# Altium PCB controller_sg3525.PcbDoc
Units mm, origin at the board's own origin, x right, y up, seen from the top; angles counter-clockwise.
Board outline 63.63 x 49.15 mm, 2 copper layers (Top Layer, Bottom Layer); 34 components, 28 nets, 100 pads, 0 vias.
Unrouted connection lines stored in the file: 4.
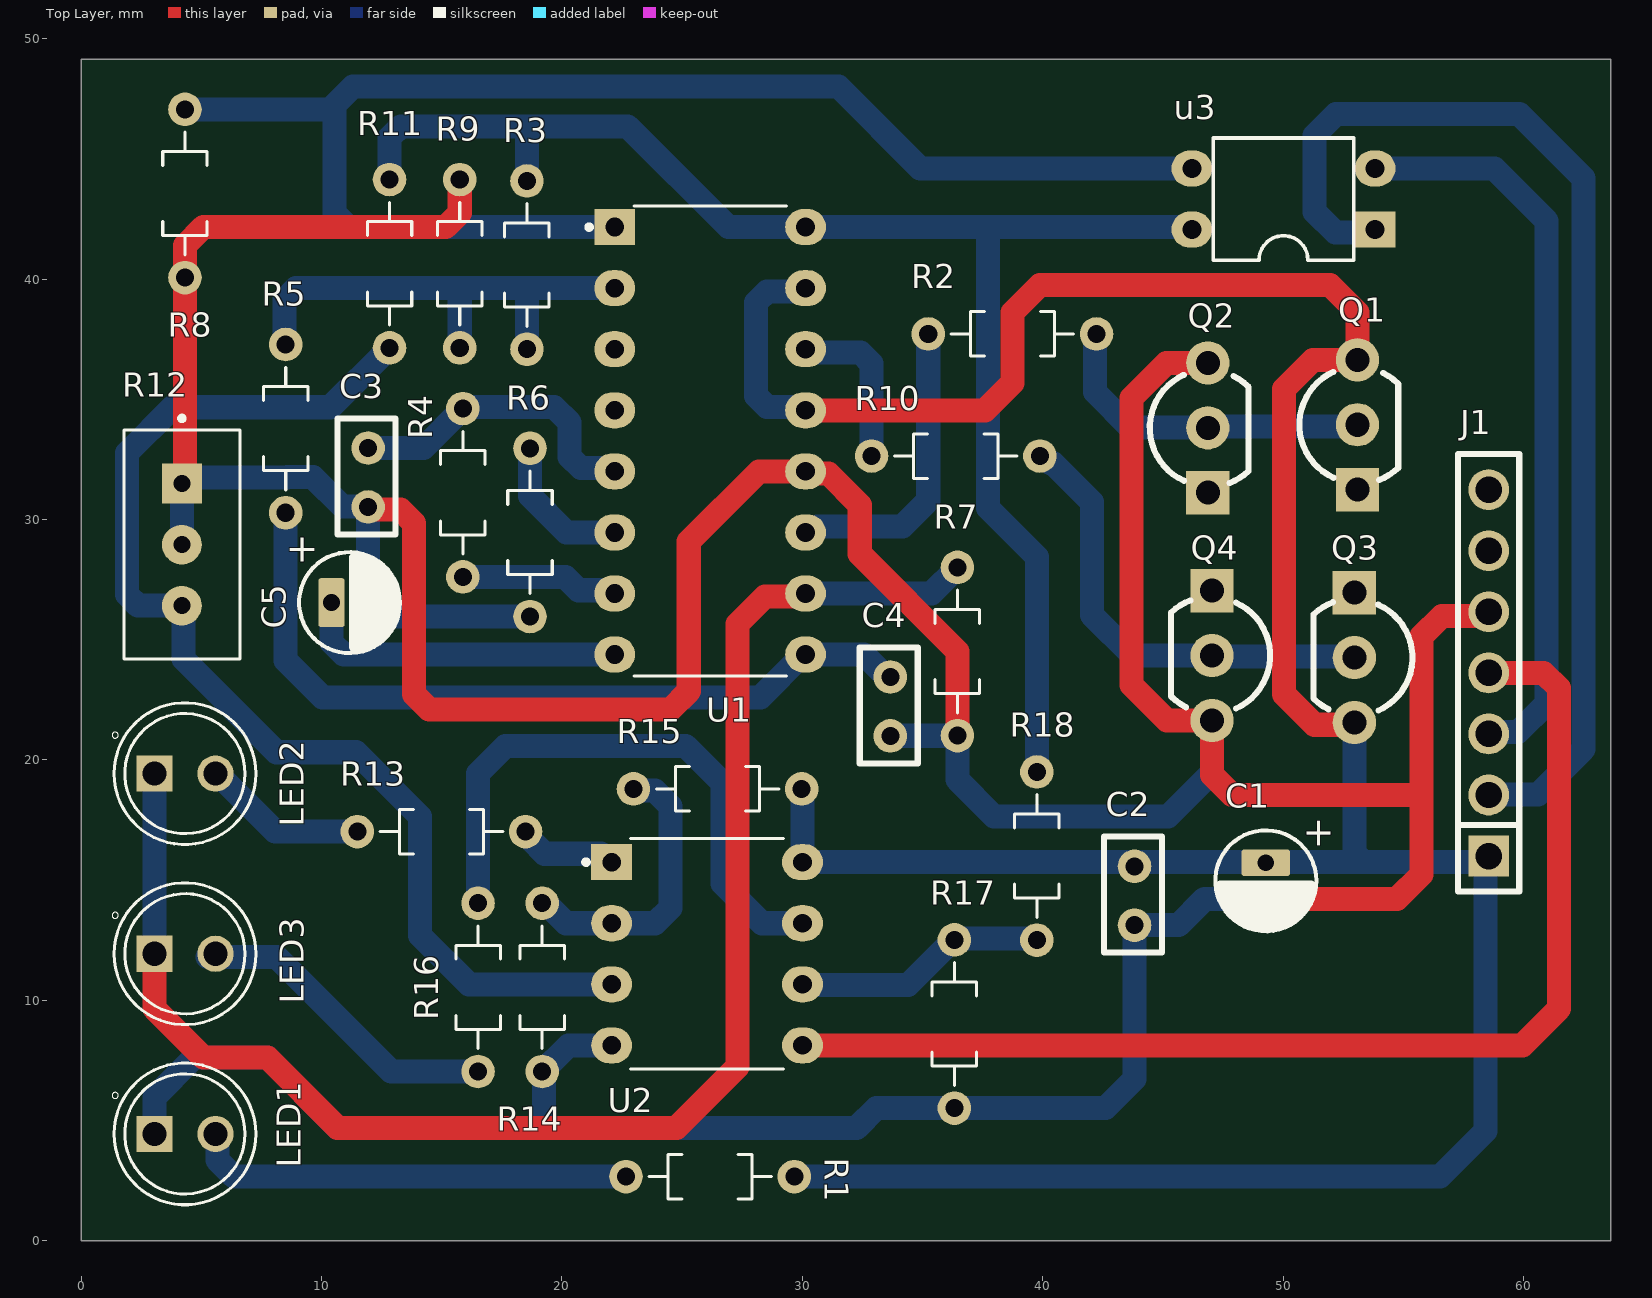
[diagram p0: Top Layer view]
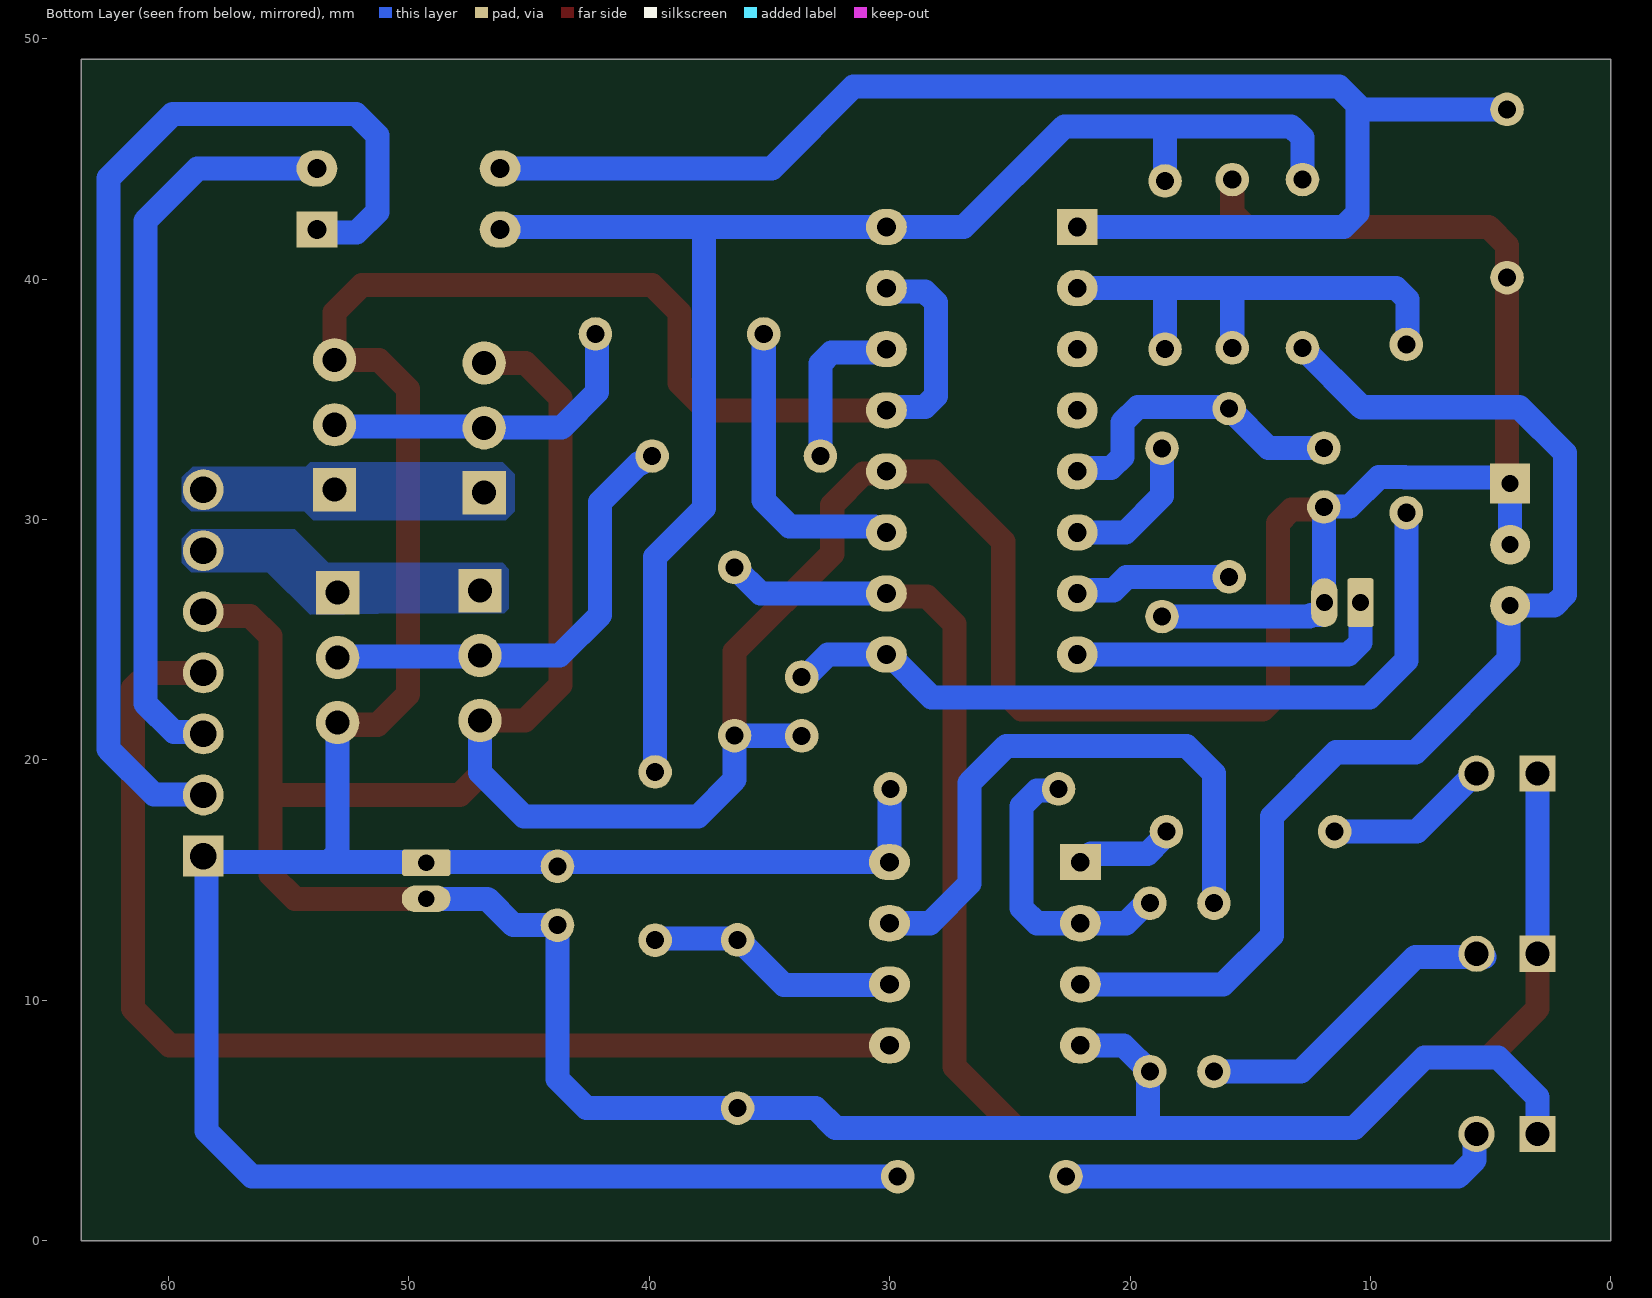
[diagram p1: Bottom Layer view, seen from below]
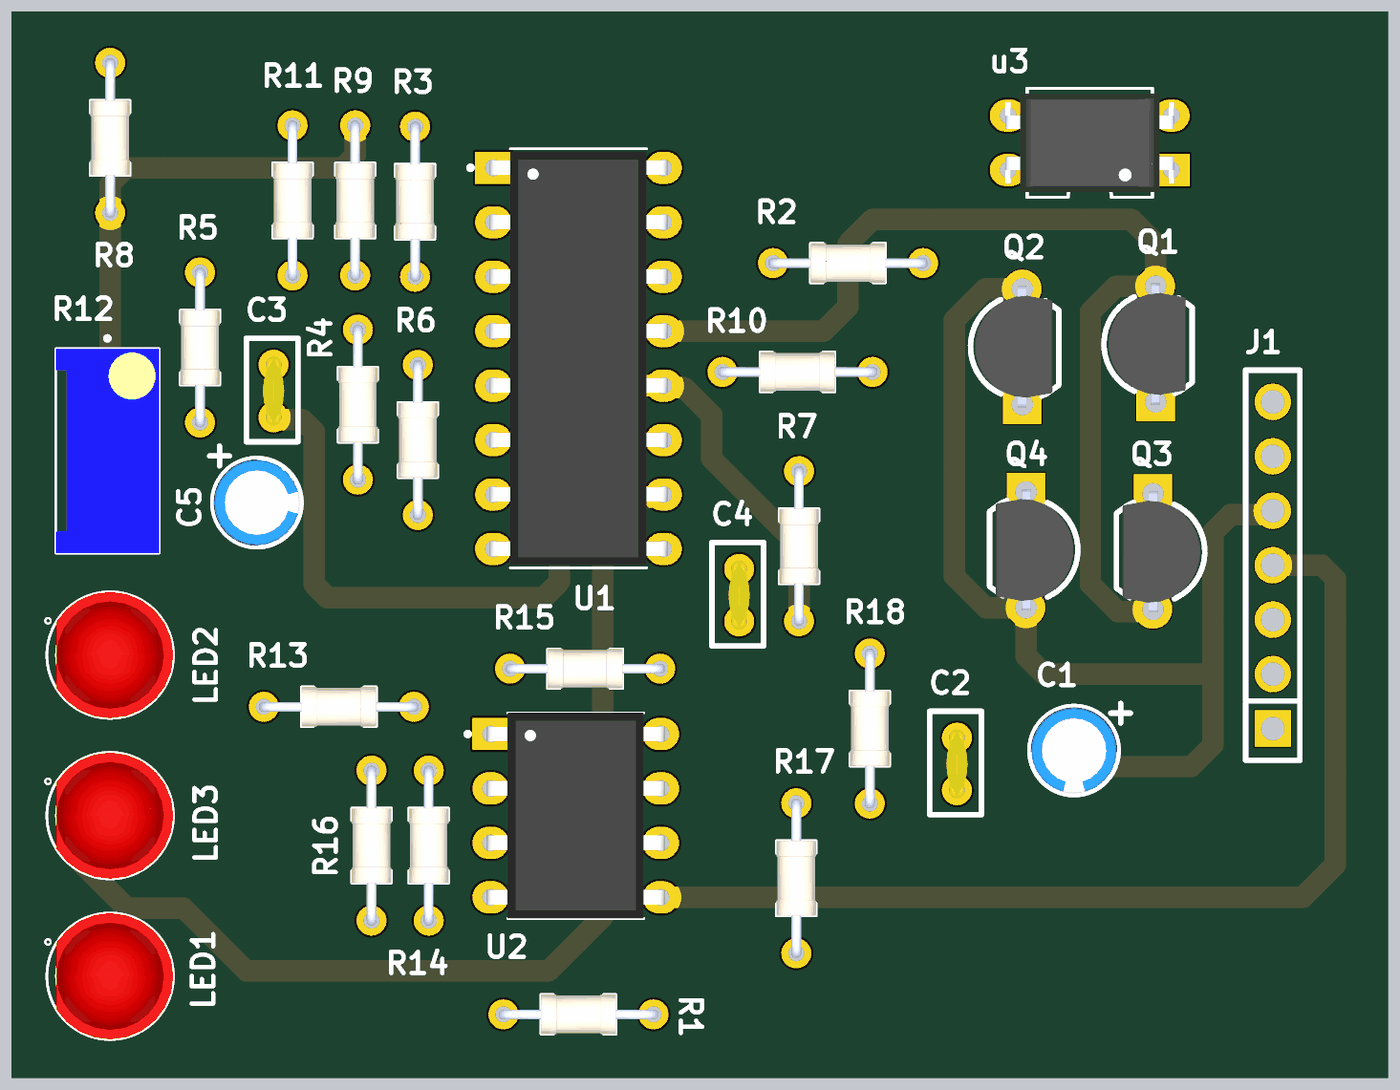
[diagram p2: 3D render of the assembled board from above, using the file's embedded part models]

## Layer stack, top to bottom
Top Solder: solder mask 0.0102, Solder Resist, Dk 3.5
Top Layer: signal copper 0.0356
Dielectric 1: dielectric 0.32, FR-4, Dk 4.8
Bottom Layer: signal copper 0.0356
Bottom Solder: solder mask 0.0102, Solder Resist, Dk 3.5

## Board outline
0,0 0,49.149 63.627,49.149 63.627,0

## Design rules (kind name [scope] priority, off if disabled: settings)
Clearance [All] p1: gap=0.254 ignorepadtopadclearanceinfootprint=FALSE except(0: Arc-Hole Track-Hole SMDPad-Hole THPad-Hole Via-Hole Fill-Hole Poly-Hole Region-Hole Text-Hole)
PlaneConnect [All] p1: planeconnectstyle=Direct reliefexpansion=0.508 reliefentries=4 reliefconductorwidth=0.254 reliefairgap=0.254
PolygonConnect [All] p1: connectstyle=Direct reliefconductorwidth=0.254 reliefentries=4 polygonreliefangle="90 Angle" airgapwidth=0.254
RoutingVias [All] p1: holewidth=0.711 width=1.27 viastyle="Through Hole" minholewidth=0.711 minwidth=1.27 maxholewidth=0.711 maxwidth=1.27
SolderMaskExpansion [All] p1: expansion=0.102 istentingtop=FALSE
Width [All] p1: maxlimit=1.5 minlimit=0.254 preferedwidth=0.8 minimp=50.000000 maximp=50.000000 favimp=50.000000
29 further rules are at their usual default settings.

## Components (designator, comment, footprint, x,y, rotation, side; value= is the part's Value field where it differs from the comment)
C1 "100UF25V" "CAP LS-1.5mm D4 H5" 49.276,15.724 r270 top
C2 "1UFCER" CAP-CER-2.54 43.815,14.351 r90 top
C3 "2.2NFCER" CAP-CER-2.54 11.938,31.75 r90 top
C4 "100nFCER" CAP-CER-2.54 33.655,22.225 r90 top
C5 "1UF25V" "CAP LS-1.5mm D4 H5" 10.414,26.543 r0 top
J1 "HDR7Pin" "HDR-TH 7P - male hader" 58.519,23.598 r90 top
LED1 "LED Red" "LED_5MM P2.5MM WHITE" 4.191,4.572 r0 top
LED2 "LED Red" "LED_5MM P2.5MM WHITE" 4.191,19.558 r0 top
LED3 "LED Red" "LED_5MM P2.5MM WHITE" 4.191,12.065 r0 top
Q1 "SS8050" TO-92 53.135,34.025 r90 top
Q2 "SS8550" TO-92 46.912,33.898 r90 top
Q3 "SS8050" TO-92 52.91,24.174 r270 top
Q4 "SS8550" TO-92 46.99,24.257 r270 top
R1 "1K" RES-TH-7mm 26.162,2.667 r0 top
R2 "1K" RES-TH-7mm 38.735,37.719 r0 top
R3 "10K" RES-TH-7mm 18.542,40.584 r90 top
R4 "10R" RES-TH-7mm 15.875,31.115 r270 top
R5 "10K" RES-TH-7mm 8.509,33.782 r90 top
R6 "5.5K" RES-TH-7mm 18.669,29.464 r90 top
R7 "100R" RES-TH-7mm 36.449,24.511 r90 top
R8 "100R" RES-TH-7mm 4.318,43.561 r90 top
R9 "10K" RES-TH-7mm 15.748,40.64 r270 top
R10 "1K" RES-TH-7mm 36.378,32.639 r180 top
R11 "20K" RES-TH-7mm 12.827,40.64 r90 top
R12 "10K" TRIM_3296W-1-250 4.191,28.956 r270 top
R13 "1K" RES-TH-7mm 14.986,17.018 r180 top
R14 "5K" RES-TH-7mm 19.177,10.541 r90 top
R15 "47K" RES-TH-7mm 26.472,18.796 r0 top
R16 "1K" RES-TH-7mm 16.51,10.541 r270 top
R17 "1K" RES-TH-7mm 36.322,9.017 r90 top
R18 "4K" RES-TH-7mm 39.751,16.002 r90 top
U1 "SG3525AN" DIP-16 26.162,33.274 r0 top
U2 "LM358" DIP-8 25.908,12.319 r0 top
u3 "PC817" DIP-4 49.784,43.18 r180 top

## Footprints (in the part's own frame and the unit in brackets; to place one, negate y for a bottom-side part, rotate by r counter-clockwise, add the part's x,y. Pads: shape width x height; smd on the part's side, far side on the other; paste and mask are expansions set on the pad)
"CAP LS-1.5mm D4 H5" [mm]
  rrect20% 1.1x2.032 hole 0.7: 1(0,0)
  oval 1.1x2.032 hole 0.7: 2(1.5,0)
  silkscreen extent -1.35,-2.1 2.85,2.1, body extent -1.25,-2 2.74,2, height 5
CAP-CER-2.54 [mm]
  round 1.397 hole 0.75: 1(-1.225,0) 2(1.225,0)
  silkscreen extent -2.37,-1.14 2.46,1.27, body extent -1.62,-0.5 1.62,0.5, height 4.99
DIP-4 [mm]
  rect 1.7x1.5 hole 0.78: 1(-4.037,1.12)
  oval 1.7x1.5 hole 0.78: 2(-4.037,-1.42) 3(3.583,-1.42) 4(3.583,1.12)
  silkscreen extent -3.15,-2.69 2.69,2.39, body extent -4.16,-2.45 3.71,2.15, height 4.55
DIP-8 [mm]
  rect 1.7x1.5 hole 0.78: 1(-3.843,3.429)
  oval 1.7x1.5 hole 0.78: 2(-3.843,0.889) 3(-3.843,-1.651) 4(-3.843,-4.191) 5(4.097,-4.191) 6(4.097,-1.651) 7(4.097,0.889) 8(4.097,3.429)
  silkscreen extent -5.01,-5.18 3.3,4.41, body extent -4.03,-5.18 4.28,4.41, height 5.08
DIP-16 [mm]
  rect 1.7x1.5 hole 0.78 mask+0.102: 1(-3.97,8.89)
  oval 1.7x1.5 hole 0.78 mask+0.102: 2(-3.97,6.35) 3(-3.97,3.81) 4(-3.97,1.27) 5(-3.97,-1.27) 6(-3.97,-3.81) 7(-3.97,-6.35) 8(-3.97,-8.89) 9(3.97,-8.89) 10(3.97,-6.35) 11(3.97,-3.81) 12(3.97,-1.27) 13(3.97,1.27) 14(3.97,3.81) 15(3.97,6.35) 16(3.97,8.89)
  silkscreen extent -5.13,-9.77 3.17,9.77, body extent -4.15,-9.65 4.15,9.65, height 5.08
"HDR-TH 7P - male hader" [mm]
  rect 1.7x1.7 hole 1.1 paste+0 mask+0.051: 1(-7.596,-0.028)
  round 1.7 hole 1.1 paste+0 mask+0.051: 2(-5.056,-0.028) 3(-2.516,-0.028) 4(0.024,-0.028) 5(2.564,-0.028) 6(5.104,-0.028) 7(7.644,-0.028)
  silkscreen extent -9.08,-1.3 9.12,1.24
"LED_5MM P2.5MM WHITE" [mil]
  round 59.37 hole 39.37: A(55,-5)
  rect 59.37x59.37 hole 39.37: C(-45,-5)
  silkscreen extent -114,-121 121,111, body extent -93,-121 121,111, height 378
RES-TH-7mm [mm]
  round 1.397 hole 0.75: 1(-3.5,0) 2(3.5,0)
  silkscreen extent -2.55,-0.92 2.55,0.92, body extent -3.72,-0.92 3.72,0.92, height 1.84
TO-92 [mm]
  rect 1.8x1.8 hole 1 paste+0 mask+0.051: 1(-2.783,0.049)
  round 1.8 hole 1 paste+0 mask+0.051: 2(-0.083,0.049) 3(2.617,0.049)
  silkscreen extent -2.38,-1.65 2.12,2.46, body extent -2.91,-1.37 2.75,2.25, height 8.77
TRIM_3296W-1-250 [mil]
  rect 65x65 hole 27.95: 1(-100,0)
  round 65 hole 27.95: 2(0,0) 3(100,0)
  silkscreen extent -211,-95 188,95, body extent -188,-95 188,95, height 455

## Part data
C1: "CAP TH AL: 100U 25V", LCSC Part #=C43351, Unit Price=0.0057
C2: "CAP: CER 1UF 50V", LCSC Part #=C1848, Unit Price=0.0104
C3: "CAP TH: CER 2.2nF", LCSC Part #=C1848, Unit Price=0.0104
C4: library part 100nFCER_2, "CAP: CER 100nF 50V", LCSC Part #=C1848, Unit Price=0.0104
C5: "CAP TH AL: 1U 25V"
J1: "HEADER: 1*7P Male"
LED1 LED2 LED3: "LED TH: 1.9V LED", LCSC Part #=C7470709
Q1 Q3: "Transistor: 25V 300mW 120@100mA,1V 1.5A NPN SOT-23", LCSC Part #=C59205, Unit Price=0.0048
Q2 Q4: "Transistor: 25V 200mW 120@100mA,1V 1.5A PNP SOT-23 EVVO", LCSC Part #=C59205, Unit Price=0.0048
R1 R2 R10 R13 R16 R17: "RES TH: 1K"
R3 R5 R9: "RES TH: 10K"
R4: "RES TH: 10R"
R6: "RES TH: 5.5K"
R7 R8: library part 100R_1, "RES TH: 100R"
R11: "RES TH: 20K"
R12: library part "10K POT", "RES TH: 10K POT"
R14: "RES TH: 5K"
R15: "RES TH: 47K"
R18: "RES TH: 4K"
U1: "Buck, Push-Pull Regulator Positive Output Step-Down, Step-Up/Step-Down - DC-DC Controller IC 16-DIP", Package="PDIP-16 ON Semiconductor", Check_prices=https://www.snapeda.com/parts/SG3525AN/STMicroelectronics/view-part/?ref=eda, MF=STMicroelectronics, MP=SG3525AN, SnapEDA_Link=https://www.snapeda.com/parts/SG3525AN/STMicroelectronics/view-part/?ref=snap
U2: "TH- dual opamp", Package="TO-220-3 Texas Instruments", Check_prices=https://www.snapeda.com/parts/LM7812CT/NOPB/Texas+Instruments/view-part/?ref=eda, MF="Texas Instruments", MP=LM7812CT/NOPB, SnapEDA_Link=https://www.snapeda.com/parts/LM7812CT/NOPB/Texas+Instruments/view-part/?ref=snap
u3: "Optoisolator Transistor Output 5000Vrms 1 Channel 4-DIP"

## Nets (pads, with @x,y where several pads share a name; then routed paths per layer and width w, separated by ;. In a path a pad name is that pad's centre, name@x,y a point inside that pad or via, vN(x,y) a via of type N, cw(c..) or ccw(c..) an arc to the next point about the centre after c; other vN are vias at no path point)
+12: C1.1 C2.2 J1.1 Q1.3 Q3.3 R1.2 R15.2 U1.13 U1.15 U2.8 | length 136
  Top Layer w1: U1.13 37.592,34.544 38.735,35.687 38.735,38.608 39.878,39.751 51.943,39.751 53.086,38.608 Q1.3 53.079,36.635 51.24,36.635 50.038,35.433 50.038,22.733 51.308,21.463 52.865,21.463 Q3.3
  Bottom Layer w1: R1.2 56.515,2.667 58.42,4.572 J1.1@58.42,15.875 ; R15.2 30.005,18.763 U2.8 43.815,15.748 49.276,15.748 52.959,15.748 53.34,15.748 ; U1.13 29.998,34.678 28.536,34.678 28.067,35.147 28.067,39.021 28.536,39.49 29.998,39.49 U1.15 ; Q3.3 52.959,16.129 53.34,15.748 ; J1.1 J1.1@58.42,15.875 ; 53.34,15.748 58.293,15.748 J1.1@58.42,15.875
DISCH: R4.2 U1.7 | length 6.6
  Bottom Layer w1: R4.2 20.137,27.615 20.694,27.058 22.058,27.058 U1.7
GND: C1.2 C2.1 C3.1 C4.1 C5.2 J1.5 LED1.C Q2.3 Q4.3 R6.1 R7.1 R8.1 R9.1 R12.1 R12.2 R14.1 R17.1 U1.12 U2.4 | length 226
  Top Layer w1: R12.1 4.318,31.623 4.318,41.402 5.08,42.164 15.162,42.164 15.748,42.75 R9.1 ; C3.1 12.052,30.411 13.277,30.411 13.843,29.845 13.843,22.733 14.478,22.098 24.511,22.098 25.273,22.86 25.273,29.083 28.194,32.004 U1.12 ; U1.12@30.228,31.908 31.084,31.908 32.385,30.607 32.385,28.575 36.449,24.511 R7.1 ; Q2.3 45.151,36.515 43.688,35.052 43.688,23.114 45.162,21.64 Q4.3 47.039,19.382 47.879,18.542 55.753,18.542 ; C1.2 54.737,14.224 55.753,15.24 55.753,18.542 ; J1.5 58.375,25.99 56.597,25.99 55.753,25.146 55.753,18.542
  Bottom Layer w1: LED1.C 3.048,5.969 4.699,7.62 7.747,7.62 10.668,4.699 19.486,4.699 ; R12.2 R12.1 4.445,31.75 8.572,31.75 8.584,31.762 9.641,31.762 10.865,30.537 11.926,30.537 C3.1 11.926,30.513 11.926,26.555 C5.2 11.914,26.158 12.053,26.02 12.477,26.02 12.533,25.964 R6.1 ; U2.4 20.264,8.128 R14.1 19.253,6.965 19.253,4.932 19.486,4.699 ; C4.1 33.66,21.006 R7.1@36.449,21.006 ; R7.1 R7.1@36.449,21.006 ; Q4.3 47.039,19.48 45.212,17.653 37.973,17.653 36.449,19.177 R7.1@36.449,21.006 ; C1.2 46.736,14.224 45.638,13.126 C2.1 43.815,6.731 42.601,5.517 R17.1 33.076,5.517 32.258,4.699 19.486,4.699
I_SENSE: J1.4 U2.5 | length 48.6
  Top Layer w1: U2.5 59.944,8.128 61.468,9.652 61.468,22.987 60.833,23.622 J1.4
NetC3_2: C3.2 R4.1 U1.5 | length 12.9
  Bottom Layer w1: C3.2 14.235,32.975 R4.1 15.943,34.683 19.673,34.683 20.32,34.036 20.32,32.607 20.789,32.138 22.058,32.138 U1.5
NetC4_2: C4.2 R5.1 U1.9 | length 33.1
  Bottom Layer w1: R5.1 8.509,24.13 10.033,22.606 28.254,22.606 30.032,24.384 U1.9 32.559,24.384 33.493,23.45 C4.2
NetC5_1: C5.1 U1.8 | length 13.6
  Bottom Layer w1: C5.1 10.414,24.892 10.922,24.384 U1.8
NetLED1_A: LED1.A R1.1 | length 18.4
  Bottom Layer w1: LED1.A 5.662,4.371 5.662,3.355 6.35,2.667 R1.1
NetLED2_A: LED2.A R13.2 | length 7
  Bottom Layer w1: LED2.A@5.533,19.558 8.073,17.018 R13.2
NetLED3_A: LED3.A R16.2 | length 13.2
  Bottom Layer w1: LED3.A@5.261,11.811 8.128,11.811 12.898,7.041 R16.2
NetQ1_2: Q1.2 Q2.2 R2.2 | length 14
  Bottom Layer w1: R2.2 42.164,37.648 42.164,35.306 43.65,33.82 46.858,33.82 Q2.2 46.926,33.878 53.023,33.878 Q1.2
NetQ3_2: Q3.2 Q4.2 R10.1 | length 19.3
  Bottom Layer w1: R10.1 40.04,32.639 40.338,32.341 40.431,32.341 42.037,30.734 42.037,26.035 43.732,24.34 Q4.2 47.081,24.299 52.917,24.299 Q3.2
NetR6_2: R6.2 U1.6 | length 6.1
  Bottom Layer w1: R6.2 18.669,30.988 20.193,29.464 U1.6
NetR11_1: R11.1 R12.3 U2.3 | length 49.7
  Bottom Layer w1: R11.1 10.358,34.671 3.81,34.671 1.905,32.766 1.905,26.885 2.374,26.416 R12.3 4.252,26.355 4.252,24.196 8.128,20.32 11.43,20.32 14.097,17.653 14.097,12.7 16.129,10.668 U2.3
NetR13_1: R13.1 U2.1 | length 4.2
  Bottom Layer w1: R13.1 18.486,16.911 18.684,16.712 18.684,16.684 19.27,16.098 21.615,16.098 21.965,15.748 U2.1
NetR14_2: R14.2 R15.1 U2.2 | length 12
  Bottom Layer w1: R14.2 19.339,14.041 20.172,13.208 U2.2 23.876,13.208 24.511,13.843 24.511,18.073 23.864,18.72 23.048,18.72 R15.1
NetR16_1: R16.1 U2.7 | length 24.9
  Bottom Layer w1: R16.1 16.51,19.431 17.653,20.574 25.146,20.574 26.67,19.05 26.67,14.859 28.321,13.208 U2.7
NetR17_2: R17.2 R18.1 U2.6 | length 10.6
  Bottom Layer w1: U2.6 30.033,10.64 34.389,10.64 36.322,12.573 R18.1@39.751,12.573
NIN: R3.1 R5.2 R9.2 U1.2 | length 20.7
  Bottom Layer w1: R5.2@8.464,37.399 8.464,39.155 8.933,39.624 15.875,39.624 ; R9.2 15.748,39.624 ; 15.955,39.624 18.545,39.624 18.835,39.624 ; R3.1@18.545,37.087 18.545,39.334 18.835,39.624 ; U1.2 18.835,39.624
opto_A: J1.2 u3.1 | length 47.2
  Bottom Layer w1: u3.1@53.821,41.933 52.174,41.933 51.308,42.799 51.308,45.974 52.197,46.863 59.817,46.863 62.484,44.196 62.484,20.447 60.597,18.56 58.565,18.56 J1.2
opto_C: J1.3 u3.2 | length 31
  Bottom Layer w1: u3.2 58.778,44.6 60.96,42.418 60.96,22.352 59.768,21.16 58.625,21.16 J1.3
PULSE_A: R2.1 U1.11 | length 12.6
  Bottom Layer w1: U1.11 30.367,29.464 30.621,29.718 34.163,29.718 35.235,30.79 R2.1
PULSE_A_G: J1.6 Q3.1 Q4.1 | length 0.1
  Bottom Layer w1: Q4.1 Q4.1@47.081,26.998 ; Q3.1@52.917,26.998 Q3.1
PULSE_B: R10.2 U1.14 | length 6.8
  Bottom Layer w1: U1.14 30.266,36.95 32.409,36.95 32.878,36.481 R10.2
PULSE_B_G: J1.7 Q1.1 Q2.1 | length 0.2
  Bottom Layer w1: Q2.1 Q2.1@46.926,31.178 ; Q1.1@53.023,31.178 Q1.1
SD: LED2.C LED3.C R7.2 U1.10 | length 65.7
  Top Layer w1: LED3.C 3.048,9.652 5.08,7.62 7.747,7.62 10.668,4.699 24.765,4.699 27.305,7.239 27.305,25.654 28.448,26.797 30.005,26.797 U1.10
  Bottom Layer w1: LED3.C LED2.C ; U1.10 35.362,26.924 R7.2
V_FB: R8.2 U1.1 u3.3 | length 60.1
  Bottom Layer w1: R8.2 10.358,47.061 10.541,47.244 ; U1.1 11.127,42.164 10.541,42.75 10.541,47.244 ; u3.3 34.902,44.6 31.496,48.006 11.303,48.006 10.541,47.244
V_REF: R3.2 R11.2 R18.2 U1.16 u3.4 | length 63.1
  Bottom Layer w1: R11.2 12.827,45.886 13.296,46.355 18.542,46.355 ; R3.2 18.542,46.355 ; R18.2@39.751,19.439 R18.2 39.751,28.448 37.719,30.48 37.719,42.037 37.592,42.164 ; u3.4@46.096,42.037 u3.4@46.201,41.933 ; u3.4@46.201,42.164 37.592,42.164 ; 18.542,46.355 22.733,46.355 26.924,42.164 U1.16 37.592,42.164
pads on no net: U1.3 U1.4

## Polygon pours and split planes (outlines as drawn)
PULSE_A_G on Bottom Layer "PULSE_A_G_L02_P001" (solid, pour order 1): 55.88,27.813 59.055,27.813 59.436,28.194 59.436,29.21 59.055,29.591 54.737,29.591 53.34,28.194 46.101,28.194 45.847,27.94 45.847,26.289 46.038,26.098 49.847,26.098 54.102,26.035
PULSE_B_G on Bottom Layer "PULSE_B_G_L02_P000" (solid, pour order 0): 58.992,32.194 54.292,32.194 54.102,32.385 46.101,32.385 45.593,31.877 45.593,30.353 45.974,29.972 53.975,29.972 54.356,30.353 59.055,30.353 59.436,30.734 59.436,31.75

## Silkscreen, mask and mechanical layers (free items; w line width, h text height)
Board:
  the board outline again, w0.6

## Text inside footprints (layer, text, board x,y; h text height)
C1: Top Overlay "+" at 50.981,17.629 h1.2 r270
C5: Top Overlay "+" at 8.509,28.248 h1.2